# Altium PCB PCB2.PcbDoc (part 2 of 2)
Units mm, origin at the board's own origin, x right, y up, seen from the top; angles counter-clockwise.
Board outline 84.2 x 135.51 mm, 2 copper layers (Top Layer, Bottom Layer); 89 components, 95 nets, 365 pads, 160 vias.
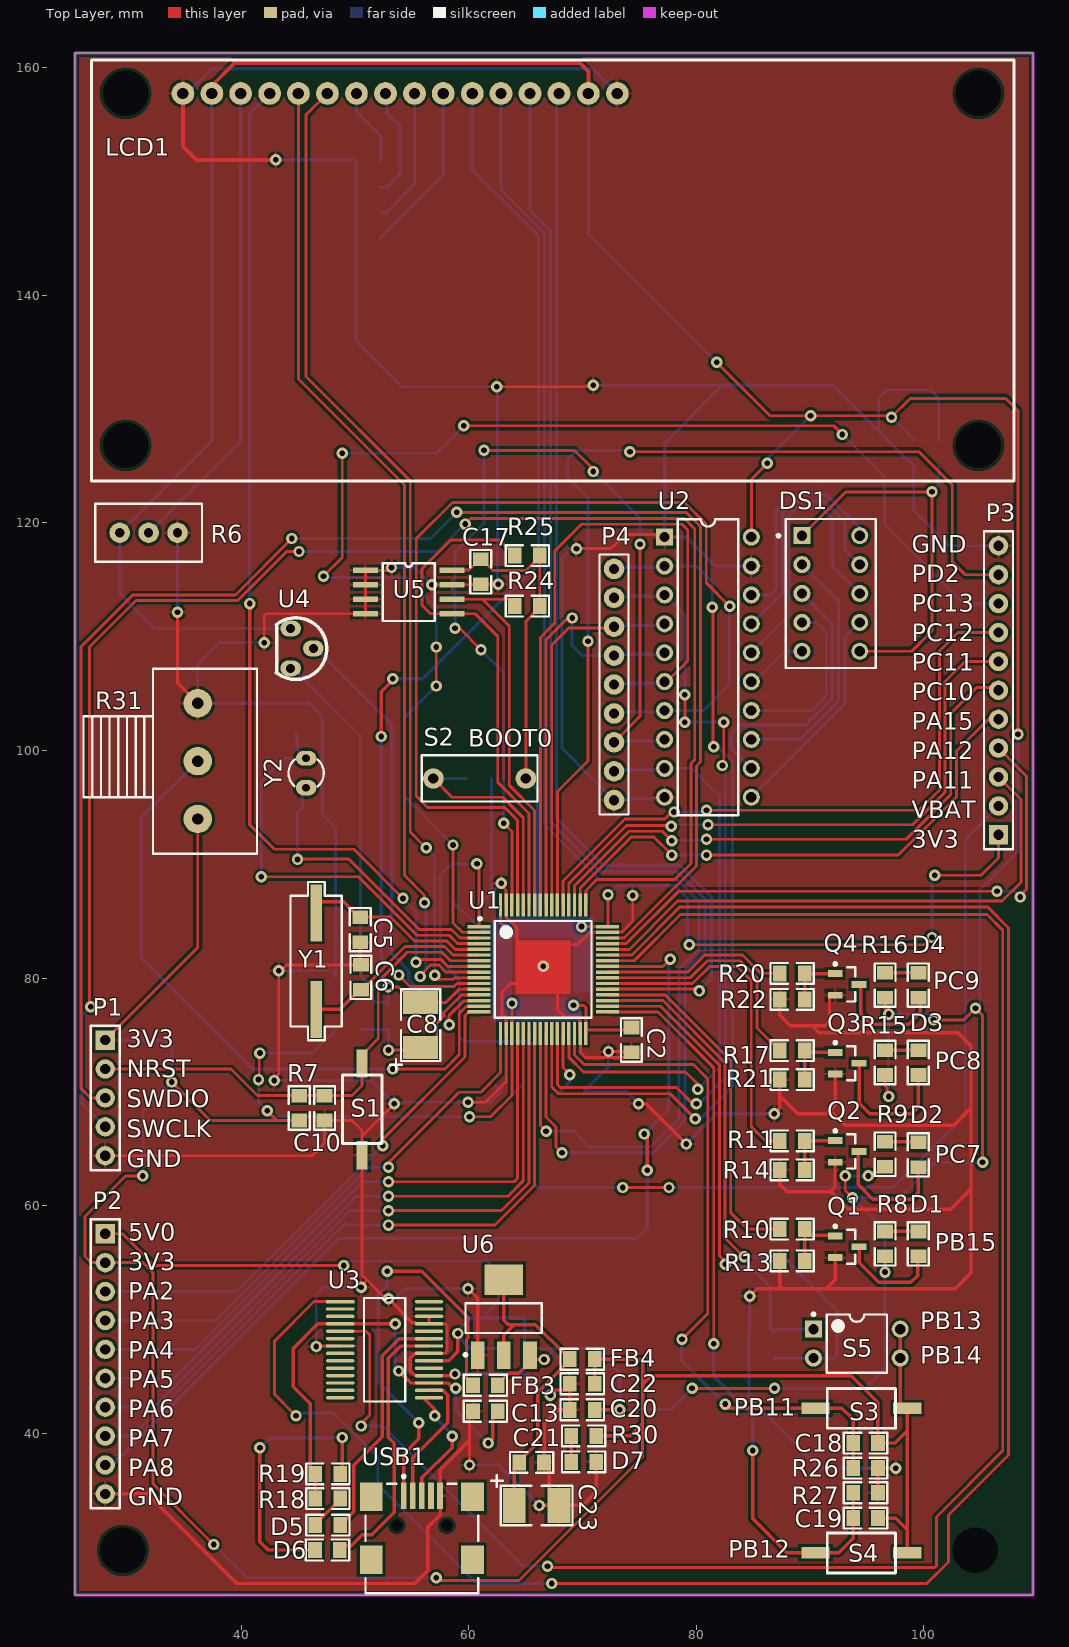
[diagram p0: Top Layer view]

## Other copper (continued)
Bottom Layer: (continued)
  rectangle net 3V3: 61.976,83.566 70.993,85.344

## Silkscreen, mask and mechanical layers (free items; w line width, h text height)
Top Overlay:
  text "GND" at 98.933,117.348 h1.52
  text "PD2" at 98.933,114.757 h1.52
  text "PC13" at 98.933,112.166 h1.52
  text "PC12" at 98.933,109.576 h1.52
  text "PC11" at 98.933,106.985 h1.52
  text "PC10" at 98.933,104.394 h1.52
  text "PA15" at 98.933,101.803 h1.52
  text "BOOT0" at 59.944,100.33 h1.52
  text "PA12" at 98.933,99.212 h1.52
  text "PA11" at 98.933,96.622 h1.52
  text "VBAT" at 98.933,94.031 h1.52
  text "3V3" at 98.933,91.44 h1.52
  text "PC9" at 100.838,78.994 h1.52
  text "3V3" at 29.972,73.914 h1.52
  text "PC8" at 100.965,71.994 h1.52
  text "NRST" at 29.972,71.279 h1.52
  text "SWDIO" at 29.972,68.644 h1.52
  text "SWCLK" at 29.972,66.008 h1.52
  text "PC7" at 100.965,63.754 h1.52
  text "GND" at 29.972,63.373 h1.52
  text "5V0" at 30.099,56.896 h1.52
  text "PB15" at 100.965,56.058 h1.52
  text "3V3" at 30.099,54.314 h1.52
  text "PA2" at 30.099,51.732 h1.52
  text "PA3" at 30.099,49.15 h1.52
  text "PB13" at 99.695,49.149 h1.52
  text "PA4" at 30.099,46.568 h1.52
  text "PB14" at 99.695,46.101 h1.52
  text "PA5" at 30.099,43.985 h1.52
  text "PB11" at 83.312,41.529 h1.52
  text "PA6" at 30.099,41.403 h1.52
  text "PA7" at 30.099,38.821 h1.52
  text "PA8" at 30.099,36.239 h1.52
  text "GND" at 30.099,33.657 h1.52
  text "PB12" at 82.804,29.083 h1.52

## Text inside footprints (layer, text, board x,y; h text height)
USB1: Mechanical 1 "PCB Edge" at 51.849,26.221 h0.25